# EAGLE board Surprising Snicket-Wluff (EAGLE 9.7.0)

Size 91.71 x 152.02 mm. Coordinates in mm from the lower left corner, seen from the top.
Outline: 0,0 91.71,0 91.71,152.02 0,152.02 0,0
Copper layers (1*16): Top 0.035mm / dielectric 1.5mm / Bottom 0.035mm
Design rules "default": minimum track width 6mil, minimum drill 0.35mm, track to track 6mil, track to pad 6mil, pad to pad 6mil, via to via 6mil, smd to smd 6mil, copper to edge 40mil, drill to drill 6mil, minimum pad ring 10mil, minimum via ring 8mil, stop-mask expansion 4mil, vias tented up to drill 0mil, thermal gap 10mil

## Footprints (pad centres in the part's own frame; a part is rotated, then mirrored left to right if it is on the bottom)
LEDRD254W60D565H860B = drill 0.981 pad 1.581: 1 -1.27,0; 2 1.27,0
GL5528 = drill 0.8 pad 1.4: 1 -1.702,0; 2 1.702,0
RESAD1016W63L850D250B = drill 0.83 pad 1.43: 1 -5.08,0; 2 5.08,0
ARDUINO-UNO-R3-SHIELD = drill 1.016 pad 1.88: 3.3V 24.13,-2.54; 5V 24.13,0; A0 24.13,12.7; A1 24.13,15.24; A2 24.13,17.78; A3 24.13,20.32; A4 24.13,22.86; A5 24.13,25.4; AREF -24.13,-13.97; D2 -24.13,20.32; D3 -24.13,17.78; D4 -24.13,15.24; D5 -24.13,12.7; D6 -24.13,10.16; D7 -24.13,7.62; D8 -24.13,3.81; D9 -24.13,1.27; D10 -24.13,-1.27; D11 -24.13,-3.81; D12 -24.13,-6.35; D13 -24.13,-8.89; GND@0 24.13,2.54; GND@1 24.13,5.08; GND@2 -24.13,-11.43; IOREF 24.13,-7.62; NC 24.13,-10.16; RES 24.13,-5.08; RX -24.13,25.4; SCL -24.13,-19.05; SDA -24.13,-16.51; TX -24.13,22.86; VIN 24.13,7.62

## Placement (x,y rotation side)
DLED_1  RED  [LEDRD254W60D565H860B]  50.81,87.28 180 top
RPHOTORES_1  PHOTOCELL_GL5528  [GL5528]  55.37,6.99 0 top
RRES_1  10k  [RESAD1016W63L850D250B]  71.22,9.83 90 top
RRES_2  220  [RESAD1016W63L850D250B]  63.74,85.45 210 top
UBASE_STATION_ARDUINO  ARDUINO-UNO-R3-SHIELD  [ARDUINO-UNO-R3-SHIELD]  43.83,122.18 90 top
UROVER_ARDUINO  ARDUINO-UNO-R3-SHIELD  [ARDUINO-UNO-R3-SHIELD]  47.88,47.42 270 top

## Library data of the parts
DLED_1 = Tinkercad; CATEGORY: Opto-Electronic; SUB-CATEGORY: LED; VALUE: LED_RED
RPHOTORES_1 RRES_1 RRES_2 UBASE_STATION_ARDUINO UROVER_ARDUINO = Tinkercad

## Nets
DLED_1_A: DLED_1.1 RRES_2.2
UBASE_STATION_ARDUINO_D13: RRES_2.1 UBASE_STATION_ARDUINO.D13
UROVER_ARDUINO_5V: RPHOTORES_1.1 UROVER_ARDUINO.5V
UROVER_ARDUINO_A0: RPHOTORES_1.2 RRES_1.1 UROVER_ARDUINO.A0
UROVER_ARDUINO_D2: UBASE_STATION_ARDUINO.D2 UROVER_ARDUINO.D2
UROVER_ARDUINO_GND: DLED_1.2 RRES_1.2 UBASE_STATION_ARDUINO.GND@0 UBASE_STATION_ARDUINO.GND@1 UBASE_STATION_ARDUINO.GND@2 UROVER_ARDUINO.GND@0 UROVER_ARDUINO.GND@1 UROVER_ARDUINO.GND@2

## Tracks (layer width: path | path; a pad name or v marks a point on that pad's centre or on a via)
DLED_1_A  (1 unrouted)
UBASE_STATION_ARDUINO_D13  (1 unrouted)
UROVER_ARDUINO_5V  (1 unrouted)
UROVER_ARDUINO_A0  (2 unrouted)
UROVER_ARDUINO_D2  (1 unrouted)
UROVER_ARDUINO_GND  (7 unrouted)